# Altium PCB S203-RA.PcbDoc (part 1 of 2)
Units mm, origin at the board's own origin, x right, y up, seen from the top; angles counter-clockwise.
Board outline 500 x 12 mm, 2 copper layers (Component Side, Solder Side), stack 0.271 mm thick; 39 components, 86 nets, 212 pads, 204 vias.
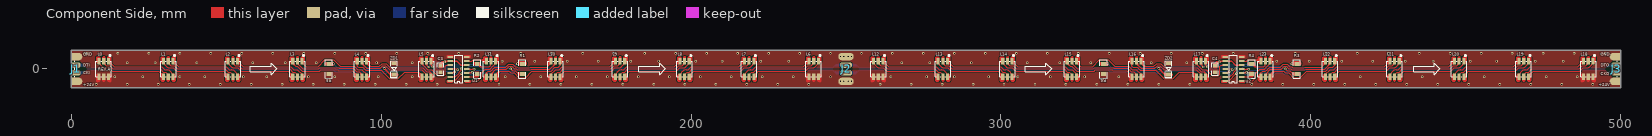
[diagram p0: Component Side view]
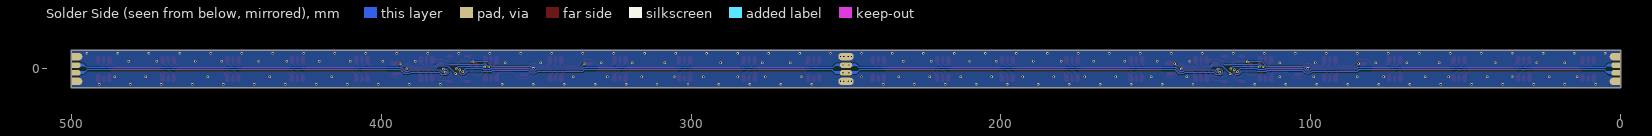
[diagram p1: Solder Side view, seen from below]

## Layer stack, top to bottom
Component Side: signal copper 0.0356
Dielectric: core 0.2, FR-4, Dk 4.8
Solder Side: signal copper 0.0356

## Board outline
0,-6 500,-6 500,6 0,6 0,-6

## Design rules (kind name [scope] priority, off if disabled: settings)
Clearance [(IsRegion)] p1 off: gap=0.35
Clearance Clearance_1 [All] p2: gap=0.33
ComponentClearance [All] p1: gap=0.1 collisioncheckmode=3 verticalgap=2540 showdistances=FALSE
FabricationTestPointUsage TestPointUsage [All] p1: valid=0 allowmultiple=FALSE
FabricationTestpoint Testpoint [All] p1: side=3 testpointundercomponent=TRUE minsize=1.016 maxsize=2.54 preferedsize=1.524 minholesize=0 maxholesize=1.016 preferedholesize=0.813 testpointgrid=0.025 allowsidetop=TRUE allowsidebottom=TRUE usegrid=TRUE gridtolerance=0
HoleSize [All] p1: absolutevalues=TRUE maxlimit=2.54 minlimit=0 maxpercent=80.000 minpercent=20.000
HoleToHoleClearance [All] p1: gap=0.1 allowstackedmicrovias=FALSE
MinimumSolderMaskSliver [All] p1: minsoldermaskwidth=0.05
PolygonConnect [All vs HasFootprint('STRIP_INTER')] p1 off: connectstyle=Direct reliefconductorwidth=0.254 reliefentries=4 polygonreliefangle="90 Angle"
PolygonConnect PolygonConnect_2 [All vs (HasFootprint('STRIPHEAD'))] p2 off: connectstyle=Direct reliefconductorwidth=0.6 reliefentries=4 polygonreliefangle="90 Angle"
PolygonConnect PolygonConnect_1 [All vs (IsVia)] p3 off: connectstyle=Direct reliefconductorwidth=0.254 reliefentries=4 polygonreliefangle="90 Angle"
PolygonConnect PolygonConnect_3 [All] p4: connectstyle=Direct reliefconductorwidth=0.6 reliefentries=4 polygonreliefangle="90 Angle"
RoutingVias [All] p1: holewidth=0.4 width=0.8 viastyle="Through Hole" minholewidth=0.3 minwidth=0.6 maxholewidth=2 maxwidth=3
SilkToSilkClearance [All] p1 off: silktosilkclearance=0.05
SilkscreenOverComponentPads [All] p1 off: minsilkscreentomaskgap=0.01
SolderMaskExpansion SolderMaskExpansion_4 [HasFootprint('5050RGB')] p1: expansion=0.12
SolderMaskExpansion SolderMaskExpansion_3 [HasFootprint('SOP16-50')] p2: expansion=0.102
SolderMaskExpansion [HasFootprint('SOP8-50')] p3: expansion=0.102
SolderMaskExpansion SolderMaskExpansion_1 [(IsVia)] p4: expansion=-1
SolderMaskExpansion SolderMaskExpansion_2 [All] p5: expansion=0.05
Width [All] p1: maxlimit=10 minlimit=0.1 preferedwidth=0.254
20 further rules are at their usual default settings.

## Components (designator, comment, footprint, x,y, rotation, side; value= is the part's Value field where it differs from the comment)
C3 "0.33U/20V" 0805 119.1,0 r0 top
C4 "0.33U/20V" 0805 369.1,0 r0 top (schematic designator C3)
J1 "4 HEADER" STRIPHEAD#1 0,0 r0 top
J2 "4 HEADER" STRIP_INTER 250,-1.25 r0 top
J3 "4 HEADER" STRIPHEAD#2 500,0 r180 top
L0 "5050RGB" 5050RGB#1 10.417,0.013 r270 top locked
L1 "5050RGB" 5050RGB#2 31.25,0.013 r270 top locked
L2 "5050RGB" 5050RGB#3 52.083,0.013 r270 top locked
L3 "5050RGB" 5050RGB#4 72.917,0.013 r270 top locked
L4 "5050RGB" 5050RGB#1 93.75,0.013 r270 top locked
L5 "5050RGB" 5050RGB#1 114.583,0.013 r270 top locked
L6 "5050RGB" 5050RGB#1 239.583,0.013 r270 top locked
L7 "5050RGB" 5050RGB#1 218.75,0.013 r270 top locked
L8 "5050RGB" 5050RGB#1 197.917,0.013 r270 top locked
L9 "5050RGB" 5050RGB#1 177.083,0.013 r270 top locked
L10 "5050RGB" 5050RGB#1 156.25,0.013 r270 top locked
L11 "5050RGB" 5050RGB#1 135.417,0.013 r270 top locked
L12 "5050RGB" 5050RGB#1 260.417,0.013 r270 top locked
L13 "5050RGB" 5050RGB#1 281.25,0.013 r270 top locked
L14 "5050RGB" 5050RGB#1 302.083,0.013 r270 top locked
L15 "5050RGB" 5050RGB#1 322.917,0.013 r270 top locked
L16 "5050RGB" 5050RGB#1 343.75,0.013 r270 top locked
L17 "5050RGB" 5050RGB#1 364.583,0.013 r270 top locked
L18 "5050RGB" 5050RGB#1 489.583,0.013 r270 top locked
L19 "5050RGB" 5050RGB#1 468.75,0.013 r270 top locked
L20 "5050RGB" 5050RGB#1 447.917,0.013 r270 top locked
L21 "5050RGB" 5050RGB#1 427.083,0.013 r270 top locked
L22 "5050RGB" 5050RGB#1 406.25,0.013 r270 top locked
L23 "5050RGB" 5050RGB#1 385.417,0.013 r270 top locked
R1 "330" 1206 145.567,0 r0 top
R2 "330" 1206 130.937,0 r0 top
R3 "330" 1206 395.554,0 r0 top (schematic designator R1)
R4 "330" 1206 380.898,0 r0 top (schematic designator R2)
R5 "1k" 1206 83.1,0 r180 top (schematic designator R1)
R6 "1k" 1206 333.1,0 r180 top (schematic designator R1)
U1 "D7720" SOP14-50 125,0 r180 top
U2 "D7720" SOP14-50 375,0 r180 top
ZD1 "5.1V/0.5W" D4148 104.1,0 r180 top
ZD2 "5.1V/0.5W" D4148 354.1,0 r180 top (schematic designator ZD1)

## Footprints (in the part's own frame and the unit in brackets; to place one, negate y for a bottom-side part, rotate by r counter-clockwise, add the part's x,y. Pads: shape width x height; smd on the part's side, far side on the other; paste and mask are expansions set on the pad)
0805 [mil]
  rect 50x45 smd: 1(0,40) 2(0,-40)
  silkscreen extent -42,-80 42,80, body extent -25,-40 25,40, height 16
1206 [mil]
  rect 60x50 smd: 1(0,65) 2(0,-65)
  silkscreen extent -45,-115 45,115, body extent -30,-60 30,60, height 8
5050RGB#1 [mm]
  rect 2x1 smd: 1(-2.5,1.5) 2(-2.5,0) 3(-2.5,-1.5) 4(2.5,-1.5) 5(2.5,0) 6(2.5,1.5)
  Component Side lines w1: 3.635,-2.032 2.645,-2.032 cw(c2.645,-1.165) 2.032,-1.778 ; -3.635,-2.032 -2.645,-2.032 ccw(c-2.645,-1.165) -2.032,-1.778 ; 3.659,-2.008 3.659,-1.5 2.5,-1.5 ; -3.659,-2.008 -3.659,-1.5 -2.5,-1.5 ; 3.683,0 2.5,0 ; -2.5,0 -3.683,0 ; 2.5,1.5 3.659,1.5 3.659,2.008 ; -2.5,1.5 -3.659,1.5 -3.659,2.008 -3.635,2.032 -2.645,2.032 cw(c-2.645,1.165) -2.032,1.778 ; 2.032,1.778 cw(c2.645,1.165) 2.645,2.032 3.635,2.032 ; -3.683,0 ccw(c-3.683,0) -3.683,0
  silkscreen extent -4.55,-2.5 2.5,2.5
5050RGB#2 [mm]
  rect 2x1 smd: 1(-2.5,1.5) 2(-2.5,0) 3(-2.5,-1.5) 4(2.5,-1.5) 5(2.5,0) 6(2.5,1.5)
  Component Side lines w1: 3.635,-2.032 2.645,-2.032 cw(c2.645,-1.165) 2.032,-1.778 ; -3.635,-2.032 -2.645,-2.032 ccw(c-2.645,-1.165) -2.032,-1.778 ; 3.659,-2.008 3.659,-1.5 2.5,-1.5 ; -3.659,-2.008 -3.659,-1.5 -2.5,-1.5 ; 3.683,0 2.5,0 ; -2.5,0 -3.683,0 ; 2.5,1.5 3.659,1.5 3.659,2.008 ; -2.5,1.5 -3.659,1.5 -3.659,2.008 -3.635,2.032 -2.645,2.032 cw(c-2.645,1.165) -2.134,1.866 cw(c-2.645,1.165) -2.032,1.778 ; 2.032,1.778 cw(c2.645,1.165) 2.645,2.032 3.635,2.032 ; -3.683,0 ccw(c-3.683,0) -3.683,0
  silkscreen extent -4.55,-2.5 2.5,2.5
5050RGB#3 [mm]
  rect 2x1 smd: 1(-2.5,1.5) 2(-2.5,0) 3(-2.5,-1.5) 4(2.5,-1.5) 5(2.5,0) 6(2.5,1.5)
  Component Side lines w1: 3.635,-2.032 2.645,-2.032 cw(c2.645,-1.165) 2.032,-1.778 ; -3.635,-2.032 -2.645,-2.032 ccw(c-2.645,-1.165) -2.032,-1.778 ; 3.659,-2.008 3.659,-1.5 2.5,-1.5 ; -3.659,-2.008 -3.659,-1.5 -3.25,-1.5 -2.5,-1.5 ; 3.683,0 2.5,0 ; -2.5,0 -3.683,0 ; 2.5,1.5 3.659,1.5 3.659,2.008 ; -2.5,1.5 -3.659,1.5 -3.659,2.008 -3.635,2.032 -2.645,2.032 cw(c-2.645,1.165) -2.032,1.778 ; 2.032,1.778 cw(c2.645,1.165) 2.645,2.032 3.635,2.032 ; -3.683,0 ccw(c-3.683,0) -3.683,0
  silkscreen extent -4.55,-2.5 2.5,2.5
5050RGB#4 [mm]
  rect 2x1 smd: 1(-2.5,1.5) 2(-2.5,0) 3(-2.5,-1.5) 4(2.5,-1.5) 5(2.5,0) 6(2.5,1.5)
  Component Side lines w1: 3.635,-2.032 2.645,-2.032 cw(c2.645,-1.165) 2.032,-1.778 ; -3.635,-2.032 -2.645,-2.032 ccw(c-2.645,-1.165) -2.5,-2.02 ccw(c-2.645,-1.165) -2.032,-1.778 ; 3.659,-2.008 3.659,-1.5 2.5,-1.5 ; -3.659,-2.008 -3.659,-1.5 -2.5,-1.5 ; 3.683,0 2.5,0 ; -2.5,0 -3.683,0 ; -2.5,1.5 -3.659,1.5 -3.659,2.008 -3.635,2.032 -2.645,2.032 cw(c-2.645,1.165) -2.032,1.778 ; 2.032,1.778 cw(c2.645,1.165) 2.645,2.032 3.635,2.032 ; 3.659,2.008 3.659,1.5 2.5,1.5 ; -3.683,0 ccw(c-3.683,0) -3.683,0 ; 2.5,1.5 2.5,1.5
  silkscreen extent -4.55,-2.5 2.5,2.5
D4148 [mm]
  rect 1.6x1.2 smd: 1(0,-1.8) 2(0,1.8)
  silkscreen extent -1.1,-2.73 1.1,2.9, body extent -0.7,-1.7 0.7,1.6, height 1.4
SOP14-50 [mil]
  rect 70x25 smd: 1(-105,150) 2(-105,100) 3(-105,50) 4(-105,0) 5(-105,-50) 6(-105,-100) 7(-105,-150) 8(105,-150) 9(105,-100) 10(105,-50) 11(105,0) 12(105,50) 13(105,100) 14(105,150)
  Component Side lines w24.8: 105,150 145,150 145,165 92.07,165 ccw(c92.07,147.93) 80,160 ; 105,-150 145,-150 145,-165 92.07,-165 cw(c92.07,-147.93) 80,-160 ; -80,160 ccw(c-92.07,147.93) -92.07,165 -145,165 -145,150 -105,150 ; -80,-160 cw(c-92.07,-147.93) -92.07,-165 -145,-165 -145,-150 -105,-150
  silkscreen extent -50,-175 50,175, body extent -124,-177 124,177
STRIP_INTER [mm]
  oval 5x2.4 all layers, no hole: 1(0,-2.75) 4(0,5.25)
  oval 4x1.8 all layers, no hole: 2(0,0) 3(0,2.5)
STRIPHEAD#1 [mm]
  rect 2x2.4 all layers, no hole: 1(1,-4) 4(1,4)
  oval 3.5x2.4 all layers, no hole: 1(1.75,-4) 4(1.75,4)
  rect 2x1.8 all layers, no hole: 2(1,-1.25) 3(1,1.25)
  oval 3x1.8 all layers, no hole: 2(1.5,-1.25) 3(1.5,1.25)
STRIPHEAD#2 [mm]
  rect 2x2.4 all layers, no hole: 1(1,4) 4(1,-4)
  oval 3.5x2.4 all layers, no hole: 1(1.75,4) 4(1.75,-4)
  rect 2x1.8 all layers, no hole: 2(1,1.25) 3(1,-1.25)
  oval 3x1.8 all layers, no hole: 2(1.5,1.25) 3(1.5,-1.25)

## Part data
C3 C4: library part CAP
J1 J2 J3: library part "4 HEA"
L0 L1 L2 L3 L4 L5 L6 L7 L8 L9 L10 L11 L12 L13 L14 L15 L16 L17 L18 L19 L20 L21 L22 L23: library part LE
U1 U2: library part DB730
ZD1 ZD2: library part "DIODE ZENER"

## Via types
v1: diameter 0.8, hole 0.4, Component Side to Solder Side, 204 vias

## Nets (pads, with @x,y where several pads share a name; then routed paths per layer and width w, separated by ;. In a path a pad name is that pad's centre, name@x,y a point inside that pad or via, vN(x,y) a via of type N, cw(c..) or ccw(c..) an arc to the next point about the centre after c; other vN are vias at no path point)
+24V: J1.1 J2.1 J3.1 L0.4 L0.5 L0.6 L6.4 L6.5 L6.6 L12.4 L12.5 L12.6 L18.4 L18.5 L18.6 R5.1 R6.1 | length 16.9
  Component Side w1: 8.385,-3.816 cw(c9.296,-3.816) L0.4@8.917,-2.988 ; 8.385,-3.039 cw(c8.937,-3.039) L0.4@8.917,-2.487 ; 8.385,-2.259 cw(c8.584,-2.259) L0.4@8.501,-2.078 ; L0.6@11.917,-2.988 cw(c11.538,-3.816) 12.449,-3.816 ; L0.6@11.917,-2.487 cw(c11.897,-3.039) 12.449,-3.039 ; L0.6@12.333,-2.078 cw(c12.25,-2.259) 12.449,-2.259 ; 237.551,-3.816 cw(c238.462,-3.816) L6.4@238.083,-2.987 ; 237.551,-3.039 cw(c238.103,-3.039) L6.4@238.083,-2.487 ; 237.551,-2.259 cw(c237.75,-2.259) L6.4@237.667,-2.078 ; L6.6@241.083,-2.987 cw(c240.704,-3.816) 241.615,-3.816 ; L6.6@241.083,-2.487 cw(c241.063,-3.039) 241.615,-3.039 ; L6.6@241.499,-2.078 cw(c241.416,-2.259) 241.615,-2.259 ; 258.385,-3.816 cw(c259.296,-3.816) L12.4@258.917,-2.988 ; 258.385,-3.039 cw(c258.937,-3.039) L12.4@258.917,-2.487 ; 258.385,-2.259 cw(c258.584,-2.259) L12.4@258.501,-2.078 ; L12.6@261.917,-2.988 cw(c261.538,-3.816) 262.449,-3.816 ; L12.6@261.917,-2.487 cw(c261.897,-3.039) 262.449,-3.039 ; L12.6@262.333,-2.078 cw(c262.25,-2.259) 262.449,-2.259 ; 487.551,-3.816 cw(c488.462,-3.816) L18.4@488.083,-2.987 ; 487.551,-3.039 cw(c488.103,-3.039) L18.4@488.083,-2.487 ; 487.551,-2.259 cw(c487.75,-2.259) L18.4@487.667,-2.078 ; L18.6@491.083,-2.987 cw(c490.704,-3.816) 491.615,-3.816 ; L18.6@491.083,-2.487 cw(c491.063,-3.039) 491.615,-3.039 ; L18.6@491.499,-2.078 cw(c491.416,-2.259) 491.615,-2.259
  other v1: 8,-5 18,-5 28,-5 38,-5 48,-5 58,-5 68,-5 78,-5 88,-5 98,-5 108,-5 118,-5 138,-5 148,-5 158,-5 168,-5 178,-5 188,-5 198,-5 208,-5 218,-5 228,-5 238,-5 261,-5 271,-5 281,-5 291,-5 301,-5 311,-5 321,-5 331,-5 341,-5 351,-5 361,-5 381,-5 391,-5 401,-5 411,-5 421,-5 431,-5 441,-5 451,-5 461,-5 471,-5 481,-5 491,-5 248.25,-4 249.25,-4 250.75,-4 251.75,-4 14,-2.5 23,-2.5 35,-2.5 43,-2.5 55.5,-2.5 63,-2.5 76.5,-2.5 85,-2.5 99,-2.5 110,-2.5 140,-2.5 151.5,-2.5 163,-2.5 173,-2.5 183,-2.5 193,-2.5 203,-2.5 213,-2.5 223,-2.5 233,-2.5 245,-2.5 264.5,-2.5 276,-2.5 285,-2.5 296,-2.5 305.5,-2.5 316,-2.5 327,-2.5 338,-2.5 416,-2.5 436,-2.5 456,-2.5 476,-2.5 486,-2.5
CC1: J2.2 U1.4 U2.11 | length 309.8
  Component Side w0.35: U1.4@127.743,-0.076 v1(129.962,-0.076) ; U1.4@128.339,0.101 ccw(c128.766,0.528) 128.766,-0.076 ; v1@129.803,-0.235 ccw(c129.419,-0.619) 129.419,-0.076 ccw(c129.419,0.467) v1@129.803,0.083 ; U2.11@372.333,0 374.409,0 v1@374.587,-0.178 ; U2.11@373.005,-0.101 cw(c373.249,-0.344) 373.249,0 cw(c373.249,0.344) U2.11@373.005,0.101 ; v1@374.578,-0.178 v1@374.587,-0.178 ; v1@374.654,-0.245 v1@374.587,-0.178
  Solder Side w0.35: v1@129.803,-0.235 ccw(c129.419,-0.619) 129.419,-0.076 ccw(c129.419,0.467) v1@129.803,0.083 ; v1(129.962,-0.076) 129.013,-0.076 128.397,-0.692 128.397,-1.391 128.953,-1.946 130.334,-1.946 131.137,-1.143 140.649,-1.143 141.091,-1.585 142.424,-1.585 143.678,-0.33 245.618,-0.33 246.253,-0.965 ; 246.462,-0.965 cw(c246.462,-3.688) 248.387,-1.763 ccw(c247.15,-3) 247.15,-1.25 ccw(c247.15,0.5) 248.387,-0.737 cw(c247.837,-0.187) 247.837,-0.965 ; 247.307,-0.965 cw(c247.307,-2.843) 248.635,-1.515 ccw(c247.995,-2.155) 247.995,-1.25 ccw(c247.995,-0.345) J2.2@248.635,-0.985 ; 247.673,-1.575 ccw(c247.673,0.077) 248.841,-1.091 cw(c248.457,-0.707) 248.457,-1.25 cw(c248.457,-1.793) 248.841,-1.409 ccw(c247.769,-2.481) 247.769,-0.965 ; 247.999,-1.148 ccw(c248.376,-0.495) J2.2@248.857,-1.077 ; J2.2@248.436,-1.4 ccw(c248.719,-0.91) J2.2@249.08,-1.346 ; J2.2@248.518,-1.575 ccw(c248.518,-0.768) J2.2@249.088,-1.338 ; J2.2@248.614,-0.965 cw(c248.614,-1.636) J2.2@249.088,-1.162 ; J2.2@248.878,-1.275 ccw(c249.245,-1.199) J2.2@249.245,-1.575 ; J2.2@249.159,-1.409 cw(c249.543,-1.793) 249.543,-1.25 cw(c249.543,-0.707) J2.2@249.159,-1.091 ; J2.2@249.213,-1.323 cw(c249.715,-1.497) 249.715,-0.965 246.253,-0.965 ; J2.2@249.22,-1.204 ccw(c249.675,-1.11) 249.675,-1.575 246.863,-1.575 246.538,-1.25 ; J2.2@250.755,-1.575 ccw(c250.755,-1.199) J2.2@251.122,-1.275 ; J2.2@250.78,-1.204 cw(c250.325,-1.11) 250.325,-1.575 253.137,-1.575 253.462,-1.25 ; J2.2@250.787,-1.323 ccw(c250.285,-1.497) 250.285,-0.965 253.747,-0.965 ; J2.2@250.841,-1.409 ccw(c250.457,-1.793) 250.457,-1.25 ccw(c250.457,-0.707) J2.2@250.841,-1.091 ; J2.2@250.912,-1.338 ccw(c251.482,-0.768) J2.2@251.482,-1.575 ; J2.2@250.912,-1.162 cw(c251.386,-1.636) J2.2@251.386,-0.965 ; J2.2@250.92,-1.346 ccw(c251.281,-0.91) J2.2@251.564,-1.4 ; J2.2@251.143,-1.077 ccw(c251.624,-0.495) 252.001,-1.148 ; J2.2@251.365,-0.985 ccw(c252.005,-0.345) 252.005,-1.25 ccw(c252.005,-2.155) 251.365,-1.515 cw(c252.693,-2.843) 252.693,-0.965 ; 252.163,-0.965 cw(c252.163,-0.187) 251.613,-0.737 ccw(c252.85,0.5) 252.85,-1.25 ccw(c252.85,-3) 251.613,-1.763 cw(c253.538,-3.688) 253.538,-0.965 ; 252.231,-0.965 ccw(c252.231,-2.481) 251.159,-1.409 cw(c251.543,-1.793) 251.543,-1.25 cw(c251.543,-0.707) 251.159,-1.091 ccw(c252.327,0.077) 252.327,-1.575 ; v1@374.495,-0.413 cw(c374.111,-0.797) 374.654,-0.797 cw(c375.197,-0.797) v1@374.813,-0.413 ; v1@374.562,-0.162 v1(374.654,-0.254) 374.654,-1.229 ; 374.6,-1.283 374.07,-1.813 373.32,-1.813 372.79,-1.283 372.79,-0.952 372.522,-0.684 367.55,-0.684 367.284,-0.95 364.49,-0.95 364.164,-0.623 352.414,-0.623 351.622,-1.415 350.274,-1.415 349.685,-0.826 335.068,-0.826 334.572,-0.33 254.382,-0.33 253.747,-0.965 ; 246.253,-0.965 246.538,-1.25 ; 246.538,-1.25 v1(249,-1.25) J2.2@250,-1.25 v1(251,-1.25) 253.462,-1.25 ; 253.462,-1.25 253.747,-0.965
CIN: J1.2 U1.11 | length 164.3
  Component Side w0.35: U1.11@122.333,0 124.409,0 v1@124.587,-0.178 ; U1.11@123.005,-0.101 cw(c123.249,-0.344) 123.249,0 cw(c123.249,0.344) U1.11@123.005,0.101 ; v1@124.578,-0.178 v1@124.587,-0.178 ; v1@124.654,-0.245 v1@124.587,-0.178
  Solder Side w0.35: J1.2@1,-1.25 J1.2@1.5,-1.25 ; J1.2@1.118,-1.268 cw(c1.971,-2.121) J1.2@1.971,-0.914 ; J1.2@1.118,-1.232 ccw(c2.006,-0.344) J1.2@2.006,-1.6 ; J1.2@1.336,-0.914 4.572,-0.914 ; J1.2@2.005,-1.6 ccw(c2.005,-2.155) J1.2@1.613,-1.763 ; J1.2@2.04,-0.914 cw(c2.04,-0.31) J1.2@1.613,-0.737 ; J1.2@2.118,-1.267 cw(c2.94,-2.049) 2.94,-0.914 ; J1.2@2.365,-1.515 cw(c3.005,-2.155) 3.005,-1.25 cw(c3.005,-0.345) J1.2@2.365,-0.985 ; J1.2@2.372,-1.508 cw(c3.756,-2.825) 3.756,-0.914 ; J1.2@2.431,-1.074 ccw(c3.305,-0.612) 3.305,-1.6 ; J1.2@2.625,-1.75 cw(c4.572,-3.6) 4.572,-0.914 ; J1.2@2.741,-0.911 ccw(c3.886,-0.304) 3.886,-1.6 ; J1.2@2.816,-0.914 ccw(c2.816,-2.966) 1.365,-1.515 cw(c2.005,-2.155) 2.005,-1.25 cw(c2.005,-0.345) 1.365,-0.985 ccw(c2.851,0.501) J1.2@2.851,-1.6 ; 3.005,-1.6 ccw(c3.005,-2.155) 2.613,-1.763 cw(c3.85,-3) 3.85,-1.25 cw(c3.85,0.5) 2.613,-0.737 ccw(c3.04,-0.31) 3.04,-0.914 ; 3.661,-0.914 ccw(c3.661,-3.811) J1.2@1.613,-1.763 ; 3.696,-1.6 cw(c3.696,1.346) J1.2@1.613,-0.737 ; 4.661,-0.826 4.572,-0.914 ; v1@124.495,-0.413 cw(c124.111,-0.797) 124.654,-0.797 cw(c125.197,-0.797) v1@124.813,-0.413 ; v1@124.562,-0.162 v1(124.654,-0.254) 124.654,-1.229 ; 124.6,-1.283 124.07,-1.813 123.32,-1.813 122.79,-1.283 122.79,-0.952 122.522,-0.684 117.55,-0.684 117.284,-0.95 114.49,-0.95 114.164,-0.623 102.414,-0.623 101.622,-1.415 100.274,-1.415 99.685,-0.826 85.068,-0.826 84.572,-0.33 5.156,-0.33 4.572,-0.914 ; J1.2@1.5,-1.25 4.236,-1.25 ; J1.2@1.5,-1.25 1.85,-1.6 3.886,-1.6 ; J1.2@1.613,-1.763 cw(c2.85,-3) 2.85,-1.25 cw(c2.85,0.5) J1.2@1.613,-0.737 ; 3.886,-1.6 4.236,-1.25 ; 4.236,-1.25 4.572,-0.914
COUT: J3.2 U2.4 | length 158.6
  Component Side w0.35: U2.4@377.743,-0.076 v1(379.962,-0.076) ; U2.4@378.339,0.101 ccw(c378.766,0.528) 378.766,-0.076 ; v1@379.803,-0.235 ccw(c379.419,-0.619) 379.419,-0.076 ccw(c379.419,0.467) v1@379.803,0.083
  Solder Side w0.35: v1@379.803,-0.235 ccw(c379.419,-0.619) 379.419,-0.076 ccw(c379.419,0.467) v1@379.803,0.083 ; v1(379.962,-0.076) 379.013,-0.076 378.397,-0.692 378.397,-1.391 378.953,-1.946 380.334,-1.946 381.137,-1.143 390.649,-1.143 391.091,-1.585 392.424,-1.585 393.678,-0.33 494.919,-0.33 495.529,-0.94 ; 496.33,-0.94 cw(c496.33,-2.705) J3.2@497.625,-1.505 ; 496.366,-1.575 ccw(c496.366,1.284) J3.2@498.387,-0.737 ; 496.401,-0.94 cw(c496.401,-3.749) J3.2@498.387,-1.763 ; 496.743,-1.575 ccw(c496.743,-0.643) J3.2@497.568,-1.076 ; 496.899,-0.94 ccw(c496.899,-0.249) 497.387,-0.737 cw(c496.15,0.5) 496.15,-1.25 cw(c496.15,-3) 497.387,-1.763 ccw(c496.934,-2.216) 496.934,-1.575 ; J3.2@497.211,-1.575 ccw(c497.211,0.439) 498.635,-0.985 cw(c497.995,-0.345) 497.995,-1.25 cw(c497.995,-2.155) 498.635,-1.515 ccw(c497.246,-2.904) J3.2@497.246,-0.94 ; J3.2@497.258,-0.913 cw(c496.164,-0.339) 496.164,-1.575 ; J3.2@497.368,-1.743 ccw(c495.529,-3.448) 495.529,-0.94 ; J3.2@497.635,-1.515 ccw(c496.995,-2.155) 496.995,-1.25 ccw(c496.995,-0.345) J3.2@497.635,-0.985 ; J3.2@497.899,-0.94 ccw(c497.899,-0.249) J3.2@498.387,-0.737 ; J3.2@497.934,-1.575 cw(c497.934,-2.216) J3.2@498.387,-1.763 ; J3.2@498.056,-1.575 ccw(c498.056,-0.406) J3.2@498.882,-1.232 ; J3.2@498.175,-1.575 496.164,-1.575 ; J3.2@498.19,-0.94 495.529,-0.94 ; J3.2@498.5,-1.25 495.839,-1.25 ; 495.529,-0.94 495.839,-1.25 ; 495.839,-1.25 496.164,-1.575 ; J3.2@498.387,-1.763 ccw(c497.15,-3) 497.15,-1.25 ccw(c497.15,0.5) J3.2@498.387,-0.737
DD1: J2.3 U1.3 U2.12 | length 303
  Component Side w0.35: U1.3@127.667,-1.27 129.099,-1.27 v1(129.327,-1.041) ; U1.3@128.232,-1.27 ccw(c128.232,0.054) v1@129.168,-0.882 ; U1.3@128.339,-1.371 cw(c128.583,-1.614) 128.583,-1.27 cw(c128.583,-0.926) U1.3@128.339,-1.169 ; U2.12@372.935,-1.131 ccw(c373.111,-0.324) v1(373.695,-0.908) 373.333,-1.27 ; U2.12@373.005,-1.371 cw(c373.249,-1.614) 373.249,-1.27 cw(c373.249,-0.926) U2.12@373.005,-1.169 ; U2.12@373.145,-1.27 ccw(c373.145,-0.388) v1@373.786,-0.994 ; v1@373.47,-0.917 cw(c373,-0.937) 373.333,-1.27 ; v1@373.471,-0.89 cw(c373.178,-0.867) 373.325,-1.122 cw(c373.472,-1.376) v1@373.598,-1.111 ; v1@373.532,-0.753 cw(c372.333,0.378) U2.12@372.333,-1.27 373.333,-1.27 ; v1@373.686,-1.133 ccw(c373.666,-1.603) 373.333,-1.27
  Solder Side w0.35: v1(129.327,-1.041) 130.277,-1.041 130.855,-0.463 140.931,-0.463 141.373,-0.905 142.138,-0.905 143.393,0.35 245.688,0.35 246.304,0.965 ; v1@129.486,-1.2 cw(c129.871,-1.585) 129.871,-1.041 cw(c129.871,-0.498) v1@129.486,-0.882 ; 246.462,0.965 ccw(c246.462,3.688) 248.387,1.763 cw(c247.15,3) 247.15,1.25 cw(c247.15,-0.5) 248.387,0.737 ccw(c247.837,0.187) 247.837,0.965 ; 247.307,0.965 ccw(c247.307,2.843) 248.635,1.515 cw(c247.995,2.155) 247.995,1.25 cw(c247.995,0.345) J2.3@248.635,0.985 ; 247.673,1.575 cw(c247.673,-0.077) 248.841,1.091 ccw(c248.457,0.707) 248.457,1.25 ccw(c248.457,1.793) 248.841,1.409 cw(c247.769,2.481) 247.769,0.965 ; 247.999,1.148 cw(c248.376,0.495) J2.3@248.857,1.077 ; J2.3@248.436,1.4 cw(c248.719,0.91) J2.3@249.08,1.346 ; J2.3@248.518,1.575 cw(c248.518,0.768) J2.3@249.088,1.338 ; J2.3@248.614,0.965 ccw(c248.614,1.636) J2.3@249.088,1.162 ; J2.3@249.159,1.091 cw(c249.543,0.707) J2.3@249.543,1.25 ; J2.3@249.159,1.409 ccw(c249.543,1.793) J2.3@249.543,1.25 ; J2.3@249.213,1.323 ccw(c249.715,1.497) 249.715,0.965 246.304,0.965 ; J2.3@250.787,1.323 cw(c250.285,1.497) 250.285,0.965 253.696,0.965 ; J2.3@250.841,1.091 ccw(c250.457,0.707) 250.457,1.25 ccw(c250.457,1.793) J2.3@250.841,1.409 ; J2.3@250.912,1.162 ccw(c251.386,1.636) J2.3@251.386,0.965 ; J2.3@250.912,1.338 cw(c251.482,0.768) J2.3@251.482,1.575 ; J2.3@250.92,1.346 cw(c251.281,0.91) J2.3@251.564,1.4 ; J2.3@251.143,1.077 cw(c251.624,0.495) 252.001,1.148 ; J2.3@251.365,0.985 cw(c252.005,0.345) 252.005,1.25 cw(c252.005,2.155) 251.365,1.515 ccw(c252.693,2.843) 252.693,0.965 ; 252.163,0.965 ccw(c252.163,0.187) 251.613,0.737 cw(c252.85,-0.5) 252.85,1.25 cw(c252.85,3) 251.613,1.763 ccw(c253.538,3.688) 253.538,0.965 ; 252.231,0.965 cw(c252.231,2.481) 251.159,1.409 ccw(c251.543,1.793) 251.543,1.25 ccw(c251.543,0.707) 251.159,1.091 cw(c252.327,-0.077) 252.327,1.575 ; 373.302,-0.503 cw(c372.898,-0.908) v1@373.47,-0.908 ; 373.332,-0.532 ccw(c373.695,-0.169) v1@373.695,-0.683 ; v1(373.695,-0.908) 373.707,-0.908 372.804,-0.004 367.268,-0.004 367.002,-0.27 364.772,-0.27 364.445,0.057 352.132,0.057 351.34,-0.735 350.555,-0.735 349.966,-0.146 335.349,-0.146 334.853,0.35 254.312,0.35 253.696,0.965 ; 246.304,0.965 246.589,1.25 ; 246.589,1.25 v1(249,1.25) ; 246.589,1.25 246.913,1.575 248.675,1.575 v1(249,1.25) ; v1(249,1.25) J2.3@250,1.25 v1(251,1.25) ; v1(251,1.25) 251.325,1.575 253.087,1.575 253.411,1.25 ; v1(251,1.25) 253.411,1.25 ; 253.411,1.25 253.696,0.965
DIN: J1.3 U1.12 | length 163.3
  Component Side w0.35: U1.12@122.935,-1.131 ccw(c123.111,-0.324) v1(123.695,-0.908) 123.333,-1.27 ; U1.12@123.005,-1.371 cw(c123.249,-1.614) 123.249,-1.27 cw(c123.249,-0.926) U1.12@123.005,-1.169 ; U1.12@123.145,-1.27 ccw(c123.145,-0.388) v1@123.786,-0.994 ; v1@123.47,-0.917 cw(c123,-0.937) 123.333,-1.27 ; v1@123.471,-0.89 cw(c123.178,-0.867) 123.325,-1.122 cw(c123.472,-1.376) v1@123.598,-1.111 ; v1@123.532,-0.753 cw(c122.333,0.378) U1.12@122.333,-1.27 123.333,-1.27 ; v1@123.686,-1.133 ccw(c123.666,-1.603) 123.333,-1.27
  Solder Side w0.35: J1.3@1,1.25 J1.3@1.5,1.25 ; J1.3@1.118,1.232 cw(c1.944,0.406) J1.3@1.944,1.575 ; J1.3@1.325,1.575 3.937,1.575 ; J1.3@2.066,1.575 cw(c2.066,2.216) J1.3@1.613,1.763 ; J1.3@2.101,0.94 ccw(c2.101,0.249) J1.3@1.613,0.737 ; J1.3@2.365,0.985 cw(c3.005,0.345) 3.005,1.25 cw(c3.005,2.155) J1.3@2.365,1.515 ; J1.3@2.367,1.513 ccw(c3.736,2.861) 3.736,0.94 ; J1.3@2.423,1.06 cw(c3.325,0.529) 3.325,1.575 ; J1.3@2.617,1.759 ccw(c4.572,3.684) 4.572,0.94 ; J1.3@2.725,0.882 cw(c3.937,0.168) 3.937,1.575 ; J1.3@2.754,0.94 cw(c2.754,2.904) 1.365,1.515 ccw(c2.005,2.155) 2.005,1.25 ccw(c2.005,0.345) 1.365,0.985 cw(c2.789,-0.439) J1.3@2.789,1.575 ; 3.066,1.575 cw(c3.066,2.216) 2.613,1.763 ccw(c3.85,3) 3.85,1.25 ccw(c3.85,-0.5) 2.613,0.737 cw(c3.101,0.249) 3.101,0.94 ; 3.599,0.94 cw(c3.599,3.749) J1.3@1.613,1.763 ; 3.634,1.575 ccw(c3.634,-1.284) J1.3@1.613,0.737 ; 4.712,0.8 4.572,0.94 ; 123.302,-0.503 cw(c122.898,-0.908) v1@123.47,-0.908 ; 123.332,-0.532 ccw(c123.695,-0.169) v1@123.695,-0.683 ; v1(123.695,-0.908) 123.707,-0.908 122.804,-0.004 117.268,-0.004 117.002,-0.27 114.772,-0.27 114.445,0.057 102.132,0.057 101.34,-0.735 100.555,-0.735 99.966,-0.146 85.349,-0.146 84.853,0.35 5.162,0.35 4.572,0.94 ; J1.3@1.5,1.25 4.262,1.25 ; J1.3@1.5,1.25 1.81,0.94 4.572,0.94 ; J1.3@1.613,0.737 cw(c2.85,-0.5) 2.85,1.25 cw(c2.85,3) J1.3@1.613,1.763 ; 3.937,1.575 4.262,1.25 ; 4.262,1.25 4.572,0.94
DOUT: J3.3 U2.3 | length 156.1
  Component Side w0.35: U2.3@377.667,-1.27 379.099,-1.27 v1(379.327,-1.041) ; U2.3@378.232,-1.27 ccw(c378.232,0.054) v1@379.168,-0.882 ; U2.3@378.339,-1.371 cw(c378.583,-1.614) 378.583,-1.27 cw(c378.583,-0.926) U2.3@378.339,-1.169
  Solder Side w0.35: v1(379.327,-1.041) 380.277,-1.041 380.855,-0.463 390.931,-0.463 391.373,-0.905 392.138,-0.905 393.393,0.35 494.939,0.35 495.516,0.927 ; v1@379.486,-1.2 cw(c379.871,-1.585) 379.871,-1.041 cw(c379.871,-0.498) v1@379.486,-0.882 ; 496.312,0.927 ccw(c496.312,2.707) J3.3@497.624,1.504 ; 496.366,1.575 cw(c496.366,-1.284) J3.3@498.387,0.737 ; 496.37,0.927 ccw(c496.37,3.78) J3.3@498.387,1.763 ; 496.743,1.575 cw(c496.743,0.643) J3.3@497.568,1.076 ; 496.929,0.927 cw(c496.929,0.279) 497.387,0.737 ccw(c496.15,-0.5) 496.15,1.25 ccw(c496.15,3) 497.387,1.763 cw(c496.934,2.216) 496.934,1.575 ; J3.3@497.211,1.575 cw(c497.211,-0.439) 498.635,0.985 ccw(c497.995,0.345) 497.995,1.25 ccw(c497.995,2.155) 498.635,1.515 cw(c497.215,2.935) J3.3@497.215,0.927 ; J3.3@497.258,0.913 ccw(c496.164,0.339) 496.164,1.575 ; J3.3@497.366,1.74 cw(c495.516,3.438) 495.516,0.927 ; J3.3@497.635,0.985 ccw(c496.995,0.345) 496.995,1.25 ccw(c496.995,2.155) J3.3@497.635,1.515 ; J3.3@497.929,0.927 cw(c497.929,0.279) J3.3@498.387,0.737 ; J3.3@497.934,1.575 ccw(c497.934,2.216) J3.3@498.387,1.763 ; J3.3@498.056,1.575 cw(c498.056,0.406) J3.3@498.882,1.232 ; J3.3@498.5,1.25 498.177,0.927 495.516,0.927 ; J3.3@498.675,1.575 496.164,1.575 ; J3.3@499,1.25 495.839,1.25 ; 495.516,0.927 495.839,1.25 ; 495.839,1.25 496.164,1.575 ; J3.3@498.387,0.737 ccw(c497.15,-0.5) 497.15,1.25 ccw(c497.15,3) J3.3@498.387,1.763
GND: C3.2 C4.2 J1.4 J2.4 J3.4 U1.7 U1.8 U2.7 U2.8 ZD1.1 ZD2.1 | length 8.7
  Component Side w0.63: 121.317,4.191 cw(c121.317,3.744) U1.8@121.759,3.81 ; 122.047,4.191 cw(c122.047,3.852) U1.8@122.382,3.902 ; 122.368,4.27 cw(c122.158,3.486) U1.8@122.902,3.809 ; 122.777,4.191 cw(c122.777,3.96) U1.8@123.005,3.994 ; U1.7@126.995,3.994 cw(c127.223,3.96) 127.223,4.191 ; U1.7@127.098,3.809 cw(c127.842,3.486) 127.632,4.27 ; U1.7@127.618,3.902 cw(c127.953,3.852) 127.953,4.191 ; U1.7@128.241,3.81 cw(c128.683,3.744) 128.683,4.191 ; 371.317,4.191 cw(c371.317,3.744) U2.8@371.759,3.81 ; 372.047,4.191 cw(c372.047,3.852) U2.8@372.382,3.902 ; 372.368,4.27 cw(c372.158,3.486) U2.8@372.902,3.809 ; 372.777,4.191 cw(c372.777,3.96) U2.8@373.005,3.994 ; U2.7@376.995,3.994 cw(c377.223,3.96) 377.223,4.191 ; U2.7@377.098,3.809 cw(c377.842,3.486) 377.632,4.27 ; U2.7@377.618,3.902 cw(c377.953,3.852) 377.953,4.191 ; U2.7@378.241,3.81 cw(c378.683,3.744) 378.683,4.191
  other v1: 18,2 27,2 40.5,2 58.5,2 69,2 79,2 98.5,2 110,2 268,2 277,2 290.5,2 308.5,2 319,2 329,2 348.5,2 360,2 139,2.5 149.5,2.5 160,2.5 170,2.5 180.5,2.5 189.5,2.5 201.5,2.5 210,2.5 222.5,2.5 231.5,2.5 389,2.5 399.5,2.5 410,2.5 420,2.5 430.5,2.5 439.5,2.5 451.5,2.5 460,2.5 472.5,2.5 481.5,2.5 248.25,4 249.25,4 250.75,4 251.75,4 5,5 15,5 25,5 35,5 45,5 55,5 65,5 75,5 85,5 95,5 105,5 115,5 125,5 135,5 145,5 155,5 165,5 175,5 185,5 195,5 205,5 215,5 225,5 235,5 245,5 255,5 265,5 275,5 285,5 295,5 305,5 315,5 325,5 335,5 345,5 355,5 365,5 375,5 385,5 395,5 405,5 415,5 425,5 435,5 445,5 455,5 465,5 475,5 485,5 495,5
NetL0_1: L0.1 L1.6 | length 29.2
  Component Side w0.35: L0.1@11.902,2.033 cw(c12.146,1.699) 12.438,1.991 ; L0.1@11.917,2.513 12.283,2.147 12.728,1.702 ; L0.1@12.109,1.75 cw(c12.39,1.364) 12.728,1.702 ; L0.1@12.162,1.702 12.728,1.702 ; L0.1@12.233,2.09 ccw(c12.728,2.212) 12.728,1.702 ; 12.771,2.692 12.771,1.658 ; L1.6@32.75,-2.487 ccw(c30.52,-2.487) 32.097,-0.911 32.024,-0.838 ccw(c30.731,-2.132) 30.731,-0.302 30.117,-0.302 29.129,0.686 13.744,0.686 12.771,1.658 ; 12.728,1.702 12.771,1.658
  Component Side w1: L0.1@11.917,3.013 ccw(c11.804,3.647) 12.449,3.647 ; L0.1@12.092,2.028 ccw(c12.016,2.454) 12.449,2.454 ; L1.6@32.75,-2.487 cw(c32.73,-3.039) 33.282,-3.039
NetL0_2: L0.2 L1.5 | length 24.8
  Component Side w0.35: L0.2@10.417,2.513 10.417,1.77 11.166,1.021 11.177,1.021 11.191,1.008 12.344,1.008 13.352,0 28.726,0 29.708,-0.982 30.467,-0.982 31.25,-1.766 L1.5@31.25,-2.487 ; L0.2@10.742,2.013 ccw(c12.112,2.013) 11.143,1.044
NetL0_3: L0.3 L1.4 | length 27.2
  Component Side w0.35: 8.385,2.658 ccw(c9.179,2.658) 8.618,2.096 9.977,0.737 ccw(c10.965,1.724) 10.965,0.328 12.063,0.328 13.09,-0.7 28.25,-0.7 28.885,-1.335 ; L0.3@8.917,1.798 L0.3@8.917,2.513 ; 29.078,-2.489 28.885,-2.297 28.885,-1.335 ; L1.4@29.734,-1.663 cw(c29.679,-0.542) 28.886,-1.336 ; L1.4@29.75,-2.2 28.885,-1.335
  Component Side w1: 29.218,-3.039 cw(c29.77,-3.039) L1.4@29.75,-2.487
NetL1_1: L1.1 L2.6 | length 29.2
  Component Side w0.35: L1.1@32.735,2.033 cw(c32.979,1.699) 33.271,1.991 ; L1.1@32.75,2.513 33.116,2.147 33.561,1.702 ; L1.1@32.942,1.75 cw(c33.223,1.364) 33.561,1.702 ; L1.1@32.995,1.702 33.561,1.702 ; L1.1@33.066,2.09 ccw(c33.561,2.212) 33.561,1.702 ; 33.604,2.692 33.604,1.658 ; L2.6@53.583,-2.487 ccw(c51.353,-2.487) 52.93,-0.911 52.857,-0.838 ccw(c51.564,-2.132) 51.564,-0.302 50.95,-0.302 49.962,0.686 34.577,0.686 33.604,1.658 ; 33.561,1.702 33.604,1.658
  Component Side w1: L1.1@32.75,3.013 ccw(c32.637,3.647) 33.282,3.647 ; L1.1@32.925,2.028 ccw(c32.849,2.454) 33.282,2.454 ; L2.6@53.583,-2.487 cw(c53.563,-3.039) 54.115,-3.039
NetL1_2: L1.2 L2.5 | length 24.8
  Component Side w0.35: L1.2@31.25,2.513 31.25,1.77 31.999,1.021 32.01,1.021 32.024,1.008 33.177,1.008 34.185,0 49.559,0 50.541,-0.982 51.3,-0.982 52.083,-1.766 L2.5@52.083,-2.487 ; L1.2@31.575,2.013 ccw(c32.945,2.013) 31.976,1.044
NetL1_3: L1.3 L2.4 | length 27.2
  Component Side w0.35: 29.218,2.658 ccw(c30.012,2.658) 29.451,2.096 30.81,0.737 ccw(c31.798,1.724) 31.798,0.328 32.896,0.328 33.923,-0.7 49.083,-0.7 49.719,-1.335 ; L1.3@29.75,1.798 L1.3@29.75,2.513 ; 49.911,-2.489 49.719,-2.297 49.719,-1.335 ; L2.4@50.567,-1.663 cw(c50.512,-0.542) 49.719,-1.336 ; L2.4@50.583,-2.2 49.719,-1.335
  Component Side w1: 50.051,-3.039 cw(c50.603,-3.039) L2.4@50.583,-2.487
NetL2_1: L2.1 L3.6 | length 29.2
  Component Side w0.35: L2.1@53.568,2.033 cw(c53.812,1.699) 54.104,1.991 ; L2.1@53.583,2.513 54.394,1.702 ; L2.1@53.775,1.75 cw(c54.056,1.364) 54.394,1.702 ; L2.1@53.828,1.702 54.394,1.702 ; L2.1@53.899,2.09 ccw(c54.394,2.212) 54.394,1.702 ; 54.437,2.692 54.437,1.658 ; L3.6@74.417,-2.487 74.417,-1.773 72.946,-0.302 71.783,-0.302 70.795,0.686 55.41,0.686 54.437,1.658 ; 54.394,1.702 54.437,1.658
  Component Side w1: L2.1@53.583,3.013 ccw(c53.47,3.647) 54.115,3.647 ; L2.1@53.758,2.028 ccw(c53.682,2.454) 54.115,2.454 ; L3.6@74.417,-2.487 cw(c74.397,-3.039) 74.949,-3.039
NetL2_2: L2.2 L3.5 | length 24.8
  Component Side w0.35: L2.2@52.083,2.513 52.083,1.77 52.832,1.021 52.843,1.021 52.857,1.008 54.01,1.008 55.018,0 70.392,0 71.374,-0.982 72.133,-0.982 72.916,-1.766 L3.5@72.916,-2.487 ; L2.2@52.408,2.013 ccw(c53.778,2.013) 52.809,1.044
NetL2_3: L2.3 L3.4 | length 27.2
  Component Side w0.35: 50.051,2.658 ccw(c50.845,2.658) 50.284,2.096 51.643,0.737 ccw(c52.631,1.724) 52.631,0.328 53.729,0.328 54.756,-0.7 69.916,-0.7 70.551,-1.335 ; L2.3@50.583,1.798 L2.3@50.583,2.513 ; 70.744,-2.489 70.551,-2.297 70.551,-1.335 ; L3.4@71.401,-1.663 cw(c71.345,-0.542) 70.552,-1.336 ; L3.4@71.416,-2.2 70.551,-1.335
  Component Side w1: 70.885,-3.039 cw(c71.437,-3.039) L3.4@71.417,-2.487
NetL3_1: L3.1 L4.6 | length 28.8
  Component Side w0.35: L3.1@74.417,1.688 cw(c74.417,0.733) 75.092,1.408 ; L3.1@74.417,2.513 74.417,2.083 75.19,1.31 ; L3.1@74.742,2.013 ccw(c75.356,2.013) 74.922,1.578 ; 75.19,2.601 75.19,1.31 ; L4.6@95.25,-2.487 95.25,-1.773 93.682,-0.205 92.992,-0.205 92.405,-0.205 91.336,0.864 86.732,0.864 84.674,2.921 81.821,2.921 79.586,0.686 75.814,0.686 75.19,1.31
  Component Side w1: L4.6@95.25,-2.487 cw(c95.23,-3.039) 95.782,-3.039
NetL3_2: L3.2 L4.5 | length 25.1
  Component Side w0.35: L3.2@72.917,2.513 72.917,1.798 74.71,0.006 79.867,0.006 80.211,0.35 86.284,0.35 86.45,0.184 90.949,0.184 92.042,-0.91 92.922,-0.91 93.75,-1.738 L4.5@93.75,-2.487 ; 93.019,-1.007 cw(c92.038,-1.987) L4.5@93.425,-1.987
NetL3_3: L3.3 L4.4 | length 28.6
  Component Side w0.35: L3.3@71.417,2.513 71.417,1.76 72.365,0.813 72.941,0.813 74.428,-0.674 80.149,-0.674 80.493,-0.33 86.002,-0.33 86.168,-0.496 90.596,-0.496 91.431,-1.331 ; L3.3@71.742,2.013 ccw(c73.135,2.013) 72.15,1.027 ; 91.431,-2.761 91.431,-1.331 ; L4.4@91.81,-1.71 cw(c91.533,-1.987) L4.4@91.925,-1.987 ; L4.4@92.246,-1.662 cw(c92.232,-0.529) 91.431,-1.331 ; L4.4@92.25,-2.487 92.25,-1.75 91.85,-1.75 91.431,-1.331
  Component Side w1: 91.718,-3.039 cw(c92.27,-3.039) L4.4@92.25,-2.487
NetL4_1: L4.1 L5.6 | length 33.5
  Component Side w0.35: L4.1@95.25,1.688 cw(c95.25,1.295) L4.1@95.527,1.573 ; L4.1@95.25,2.513 L4.1@95.25,2.189 ; L4.1@95.284,1.689 cw(c95.376,0.805) 96.005,1.434 ; L4.1@95.575,2.013 ccw(c96.752,2.013) 95.92,1.18 ; 96.005,2.588 96.005,1.434 ; L5.6@115.798,-1.831 ccw(c115.148,-1.474) 115.672,-0.95 ; L5.6@115.896,-1.722 ccw(c115.641,-1.361) 116.083,-1.361 ; 116.002,-1.28 cw(c115.574,-1.708) L5.6@116.105,-2 ; L5.6@116.083,-2.487 116.083,-1.361 ; L5.6@116.27,-1.722 cw(c116.525,-1.361) 116.083,-1.361 ; L4.1@95.25,2.189 95.25,1.85 96.005,1.095 ; L4.1@95.25,2.189 96.005,1.434 ; 96.005,1.095 96.005,1.434 ; 96.005,1.095 96.223,0.877 96.561,0.877 ; 96.005,1.434 96.561,0.877 ; 96.561,0.877 99.396,0.877 100.274,1.755 101.587,1.755 102.961,0.381 113.395,0.381 114.726,-0.95 115.672,-0.95 ; 115.672,-0.95 116.083,-1.361
  Component Side w1: L5.6@116.083,-2.487 cw(c116.063,-3.039) 116.615,-3.039
NetL4_2: L4.2 L5.5 | length 25.6
  Component Side w0.35: L4.2@93.75,2.513 93.75,1.756 95.309,0.197 99.678,0.197 100.555,1.075 101.305,1.075 102.679,-0.299 113.109,-0.299 114.583,-1.773 L5.5@114.583,-2.487 ; L4.2@94.075,2.013 ccw(c95.479,2.013) 94.486,1.02
NetL4_3: L4.3 L5.4 | length 32.4
  Component Side w0.35: L4.3@92.02,1.783 cw(c91.465,1.228) 92.25,1.228 cw(c93.035,1.228) L4.3@92.48,1.783 ; L4.3@92.25,2.513 92.25,0.947 92.697,0.5 93.974,0.5 94.956,-0.483 99.983,-0.483 102.7,-3.2 105.4,-3.2 107.621,-0.979 111.649,-0.979 ; 112.284,-2.667 112.284,-1.614 ; 112.525,-1.425 cw(c111.962,-1.987) L5.4@112.758,-1.987 ; 112.536,-1.436 ccw(c113.083,-0.889) L5.4@113.083,-1.662 ; L5.4@112.614,-1.944 112.284,-1.614 ; L5.4@112.925,-1.704 cw(c112.664,-1.234) 112.284,-1.614 ; L5.4@113.083,-2.487 113.083,-1.983 112.079,-0.979 111.649,-0.979 ; 111.649,-0.979 112.284,-1.614
  Component Side w1: 112.551,-3.039 cw(c113.103,-3.039) L5.4@113.083,-2.487
NetL5_1: L5.1 U1.13 | length 22.6
  Component Side w0.35: L5.1@115.853,1.783 cw(c115.298,1.228) 116.083,1.228 cw(c116.868,1.228) L5.1@116.313,1.783 ; L5.1@116.083,2.513 116.083,1.215 116.288,1.01 ; 116.242,1.055 ccw(c116.653,1.466) v1@116.653,0.885 ; 116.28,1.018 cw(c115.922,0.66) v1@116.428,0.66 ; v1@116.428,0.661 ccw(c115.95,0.662) 116.288,1 ; v1@116.428,0.664 ccw(c115.95,0.672) 116.288,1.01 ; v1@116.625,0.884 cw(c116.576,1.288) 116.288,1 ; v1@116.633,0.885 cw(c116.594,1.317) 116.288,1.01 ; v1(116.653,0.66) 116.653,0.635 116.288,1 ; U1.13@122.333,-2.54 123.866,-2.54 125.095,-1.311 125.095,-1.093 125.797,-0.391 125.797,-0.203 125.594,0 v1(125.797,0) ; U1.13@123.005,-2.641 cw(c123.249,-2.884) 123.249,-2.54 cw(c123.249,-2.196) U1.13@123.005,-2.439 ; 116.288,1 116.288,1.01
  Solder Side w0.35: v1(116.653,0.66) 116.672,0.68 116.951,0.68 116.956,0.676 125.121,0.676 v1(125.797,0) ; v1@116.812,0.501 cw(c117.233,0.081) 117.233,0.676 ; v1@116.812,0.819 ccw(c117.159,1.167) 117.159,0.676 ; v1@125.572,0 ccw(c125.029,0) 125.413,0.384 ccw(c125.797,0.768) v1@125.797,0.225
NetL5_2: L5.2 R1.1 | length 49.4
  Component Side w0.35: L5.2@114.372,1.765 cw(c113.982,1.308) 114.583,1.308 ; L5.2@114.583,2.513 114.583,1.308 ; 114.782,1.109 ccw(c115.383,1.71) v1@115.383,0.86 ; L5.2@114.794,1.765 ccw(c115.184,1.308) 114.583,1.308 ; v1(115.383,0.635) 115.346,0.598 115.293,0.598 114.583,1.308
  Component Side w0.6: v1@144.003,1.58 cw(c145.016,0.568) R1.1@145.016,2 ; R1.1@145.147,1.489 ccw(c144.281,1.01) 144.281,2 ; R1.1@145.204,1.414 ccw(c144.632,0.842) 144.632,1.651 ccw(c144.632,2.46) R1.1@145.204,1.888 ; R1.1@145.6,1.651 144.466,1.651 v1(143.932,1.651) 144.281,2 ; 146.472,1.651 146.124,2 144.281,2 ; 146.777,1.702 146.777,1.93 146.422,2.286 144.567,2.286 144.281,2
  Component Side w0.8: v1(143.932,1.651) cw(c144.122,0.901) 144.669,1.448 ; 144.466,1.651 144.669,1.448 ; R1.1@145.05,1.448 144.669,1.448 ; R1.1@145.239,1.771 cw(c144.669,2.111) 144.669,1.448
  Component Side w1.2: R1.1@145.6,1.651 146.472,1.651
  Solder Side w0.35: v1(115.383,0.635) 115.357,0.61 115.322,0.61 116.278,1.565 117.028,1.565 117.237,1.356 127.893,1.356 128.046,1.509 132.028,1.509 132.622,0.914 142.981,0.914 143.717,1.651 v1(143.932,1.651) ; v1@115.383,0.86 ccw(c115.383,1.318) 115.707,0.994 ; v1@115.608,0.635 cw(c116.236,0.635) 115.792,1.079 ; 143.181,1.115 cw(c143.932,0.363) v1@143.932,1.426
NetL5_3: L5.3 U1.10 | length 18.7
  Component Side w0.35: L5.3@113.033,1.691 cw(c112.961,1.231) 113.427,1.231 ; L5.3@113.083,3.263 L5.3@113.083,2.513 113.083,1.655 113.427,1.311 ; L5.3@113.087,2.037 cw(c113.025,1.64) L5.3@113.427,1.64 ; L5.3@113.362,1.845 ccw(c113.736,1.62) 113.427,1.311 ; L5.3@113.427,2.169 113.427,1.311 ; U1.10@121.661,1.169 ccw(c121.417,0.926) 121.417,1.27 ccw(c121.417,1.614) U1.10@121.661,1.371 ; U1.10@122.333,1.27 121.047,1.27 120.641,0.864 120.641,-1.702 120.082,-2.261 118.253,-2.261 116.262,-0.27 115.008,-0.27 113.427,1.311
NetL6_1: L6.1 L7.6 | length 27.2
  Component Side w0.35: L7.6@220.25,-2.2 221.114,-1.335 ; L7.6@220.266,-1.663 ccw(c220.321,-0.542) 221.114,-1.336 ; 220.922,-2.489 221.114,-2.297 221.114,-1.335 ; L6.1@241.083,1.798 L6.1@241.083,2.513 ; 241.615,2.658 cw(c240.821,2.658) 241.382,2.096 240.023,0.737 cw(c239.035,1.724) 239.035,0.328 237.937,0.328 236.91,-0.7 221.75,-0.7 221.114,-1.335
  Component Side w1: L7.6@220.25,-2.487 cw(c220.23,-3.039) 220.782,-3.039
NetL6_2: L6.2 L7.5 | length 24.8
  Component Side w0.35: L7.5@218.75,-2.487 218.75,-1.766 219.533,-0.982 220.292,-0.982 221.274,0 236.648,0 237.656,1.008 238.809,1.008 238.823,1.021 238.834,1.021 239.583,1.77 L6.2@239.583,2.513 ; 238.857,1.044 ccw(c237.888,2.013) L6.2@239.258,2.013
NetL6_3: L6.3 L7.4 | length 29.2
  Component Side w0.35: L7.4@217.25,-2.487 cw(c219.48,-2.487) 217.903,-0.911 217.976,-0.838 cw(c219.269,-2.131) 219.269,-0.302 219.883,-0.302 220.871,0.686 236.256,0.686 237.229,1.658 ; 237.229,2.692 237.229,1.658 ; 237.562,1.991 cw(c237.854,1.699) L6.3@238.098,2.033 ; L6.3@237.767,2.09 cw(c237.272,2.212) 237.272,1.702 ; L6.3@237.838,1.702 237.272,1.702 ; L6.3@237.891,1.75 ccw(c237.61,1.364) 237.272,1.702 ; L6.3@238.083,2.513 237.717,2.147 237.272,1.702 ; 237.229,1.658 237.272,1.702
  Component Side w1: 216.718,-3.039 cw(c217.27,-3.039) L7.4@217.25,-2.487 ; 237.551,2.454 ccw(c237.984,2.454) L6.3@237.908,2.028 ; 237.551,3.647 ccw(c238.196,3.647) L6.3@238.083,3.013
NetL7_1: L7.1 L8.6 | length 27.2
  Component Side w0.35: L8.6@199.417,-2.2 200.281,-1.335 ; L8.6@199.433,-1.663 ccw(c199.488,-0.542) 200.281,-1.336 ; 200.089,-2.489 200.281,-2.297 200.281,-1.335 ; L7.1@220.25,1.798 L7.1@220.25,2.513 ; 220.782,2.658 cw(c219.988,2.658) 220.549,2.096 219.19,0.737 cw(c218.202,1.724) 218.202,0.328 217.104,0.328 216.077,-0.7 200.917,-0.7 200.281,-1.335
  Component Side w1: L8.6@199.417,-2.487 cw(c199.397,-3.039) 199.949,-3.039
NetL7_2: L7.2 L8.5 | length 24.8
  Component Side w0.35: L8.5@197.917,-2.487 197.917,-1.766 198.7,-0.982 199.459,-0.982 200.441,0 215.815,0 216.823,1.008 217.976,1.008 217.99,1.021 218.001,1.021 218.75,1.77 L7.2@218.75,2.513 ; 218.024,1.044 ccw(c217.055,2.013) L7.2@218.425,2.013
NetL7_3: L7.3 L8.4 | length 29.2
  Component Side w0.35: L8.4@196.417,-2.487 cw(c198.647,-2.487) 197.07,-0.911 197.143,-0.838 cw(c198.436,-2.131) 198.436,-0.302 199.05,-0.302 200.038,0.686 215.423,0.686 216.396,1.658 ; 216.396,2.692 216.396,1.658 ; 216.729,1.991 cw(c217.021,1.699) L7.3@217.265,2.033 ; L7.3@216.934,2.09 cw(c216.439,2.212) 216.439,1.702 ; L7.3@217.005,1.702 216.439,1.702 ; L7.3@217.058,1.75 ccw(c216.777,1.364) 216.439,1.702 ; L7.3@217.25,2.513 216.884,2.147 216.439,1.702 ; 216.396,1.658 216.439,1.702
  Component Side w1: 195.885,-3.039 cw(c196.437,-3.039) L8.4@196.417,-2.487 ; 216.718,2.454 ccw(c217.151,2.454) L7.3@217.075,2.028 ; 216.718,3.648 ccw(c217.363,3.648) L7.3@217.25,3.013
NetL8_1: L8.1 L9.6 | length 27.2
  Component Side w0.35: L9.6@178.584,-2.2 179.448,-1.335 ; L9.6@178.599,-1.663 ccw(c178.655,-0.542) 179.448,-1.336 ; 179.256,-2.489 179.448,-2.297 179.448,-1.335 ; L8.1@199.417,1.798 L8.1@199.417,2.513 ; 199.949,2.658 cw(c199.155,2.658) 199.716,2.096 198.357,0.737 cw(c197.369,1.724) 197.369,0.328 196.271,0.328 195.244,-0.7 180.084,-0.7 179.448,-1.335
  Component Side w1: L9.6@178.583,-2.487 cw(c178.563,-3.039) 179.115,-3.039
NetL8_2: L8.2 L9.5 | length 24.8
  Component Side w0.35: L9.5@177.084,-2.487 177.084,-1.766 177.867,-0.982 178.626,-0.982 179.608,0 194.982,0 195.99,1.008 197.143,1.008 197.157,1.021 197.168,1.021 197.917,1.77 L8.2@197.917,2.513 ; 197.191,1.044 ccw(c196.222,2.013) L8.2@197.592,2.013